# Altium PCB pcb.PcbDoc
Units mm, origin at the board's own origin, x right, y up, seen from the top; angles counter-clockwise.
Board outline 70.61 x 60.2 mm, 2 copper layers (Top Layer, Bottom Layer); 41 components, 34 nets, 156 pads, 19 vias.
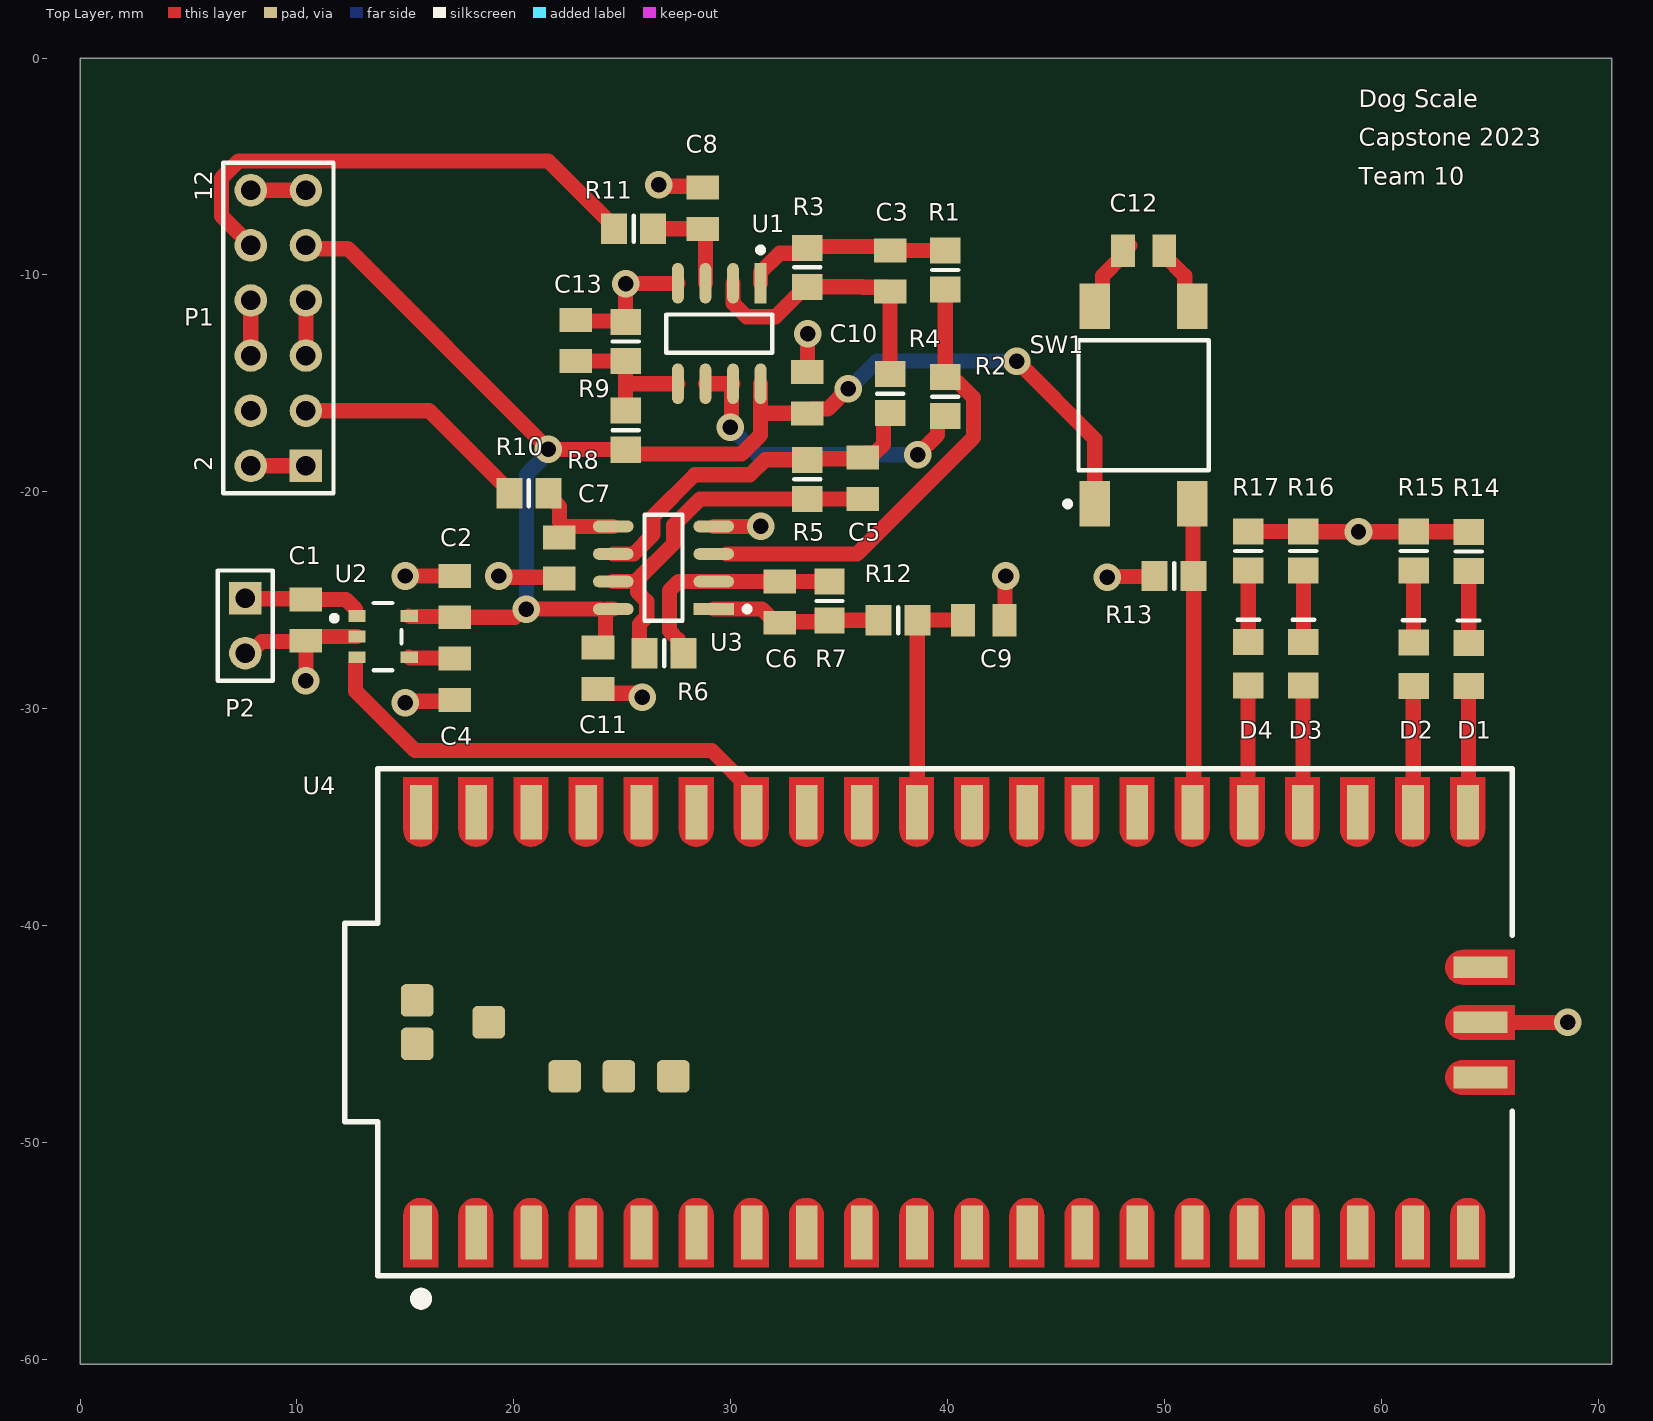
[diagram p0: Top Layer view]
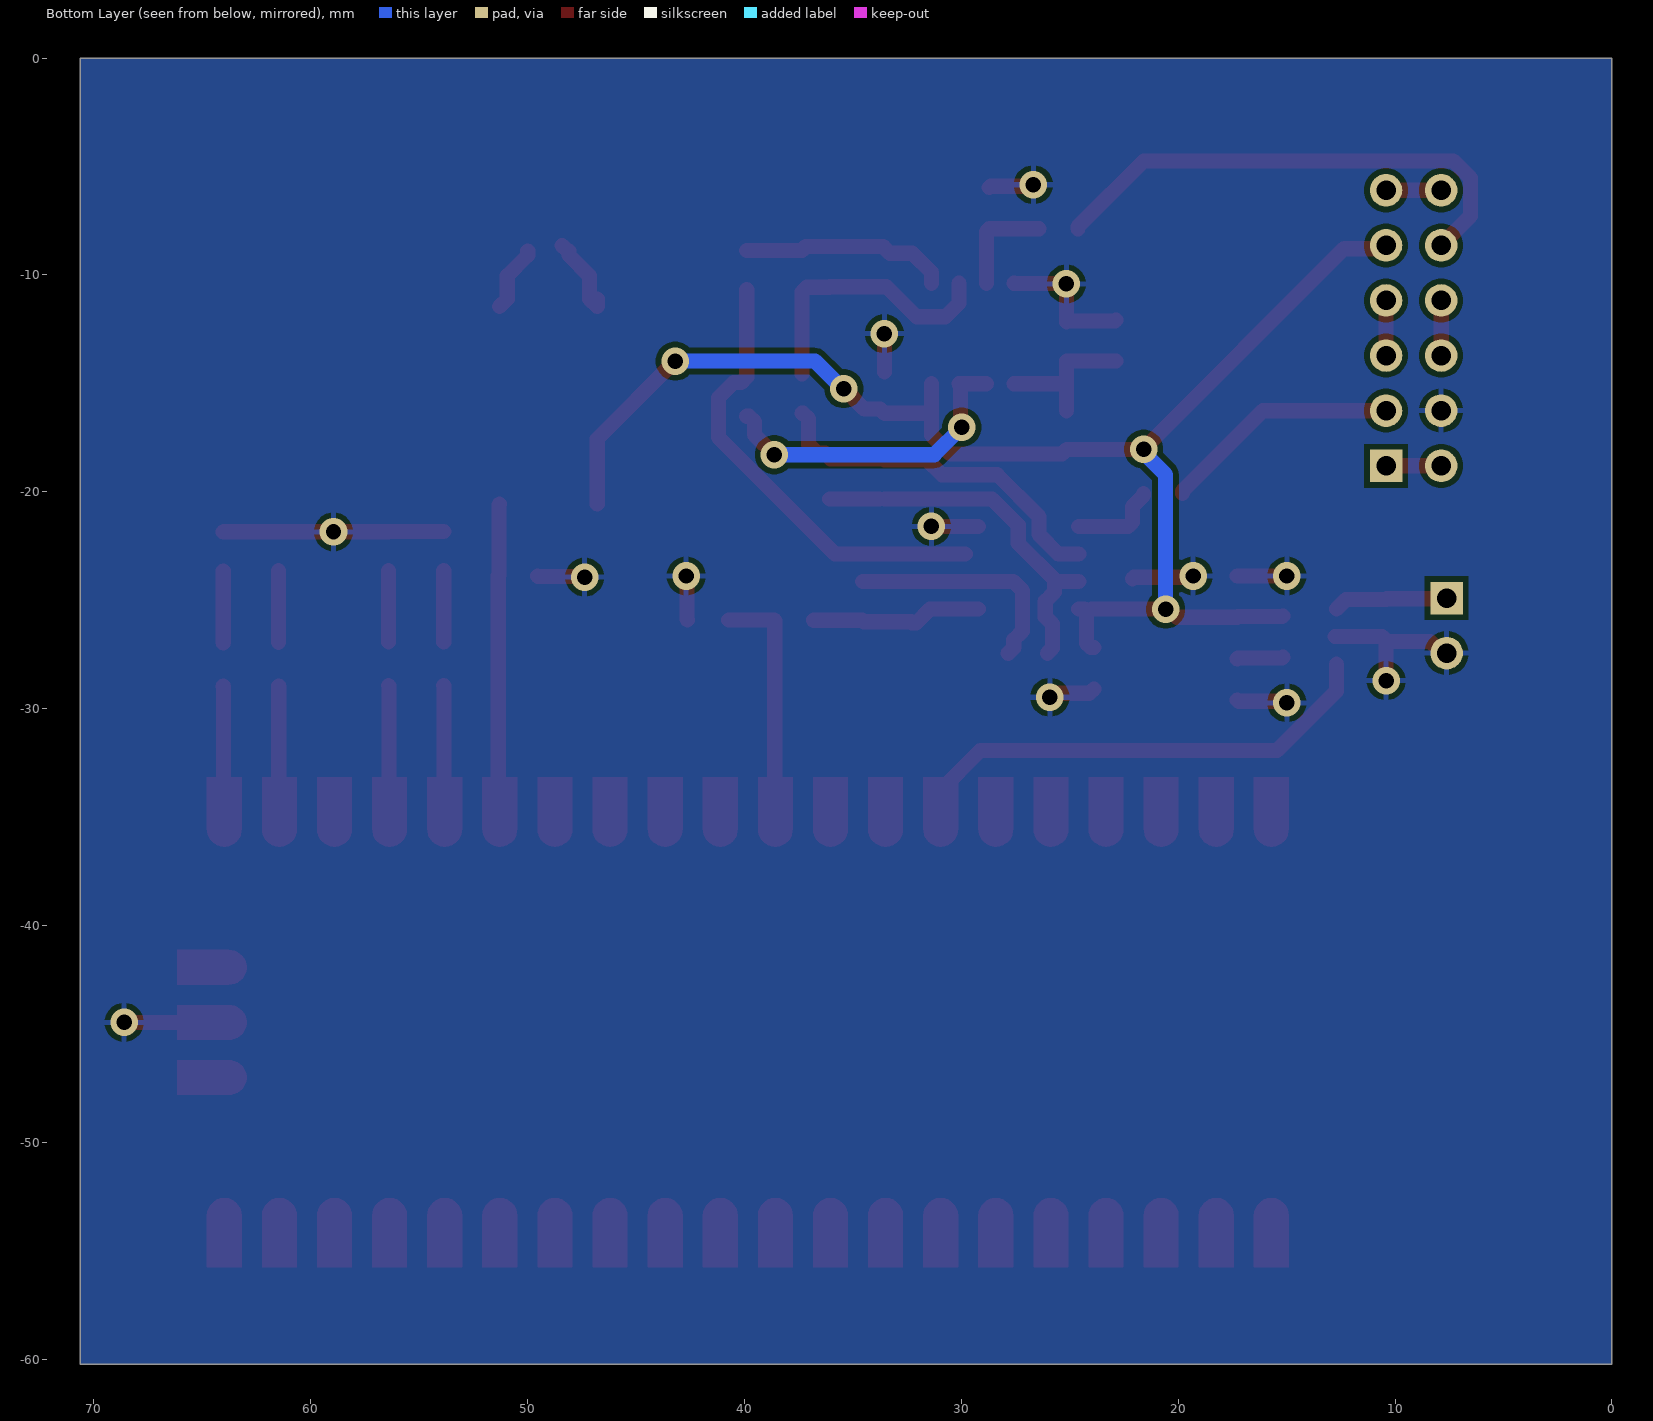
[diagram p1: Bottom Layer view, seen from below]

## Layer stack, top to bottom
Top Solder: solder mask 0.0102, Solder Resist, Dk 3.5
Top Layer: signal copper 0.0356
Dielectric 1: dielectric 0.32, FR-4, Dk 4.8
Bottom Layer: signal copper 0.0356
Bottom Solder: solder mask 0.0102, Solder Resist, Dk 3.5

## Board outline
0,-60.198 70.612,-60.198 70.612,0 0,0

## Design rules (kind name [scope] priority, off if disabled: settings)
Clearance [All] p1: gap=0.254 ignorepadtopadclearanceinfootprint=FALSE except(0: Arc-Hole Track-Hole SMDPad-Hole THPad-Hole Via-Hole Fill-Hole Poly-Hole Region-Hole Text-Hole)
PolygonConnect [All] p1: connectstyle=Relief reliefconductorwidth=0.254 reliefentries=4 polygonreliefangle="90 Angle" airgapwidth=0.254
RoomDefinition hardware [InComponentClass('hardware')] p1 off: confinementstyle=ConfineIn formatcopy=TRUE lockcomponents=FALSE outline -25.4,-127 25.4,-127 25.4,-101.6 -25.4,-101.6
RoutingVias [All] p1: holewidth=0.711 width=1.27 viastyle="Through Hole" minholewidth=0.711 minwidth=1.27 maxholewidth=0.711 maxwidth=1.27
SilkToSilkClearance [All] p1 off: silktosilkclearance=0.254
SilkToSolderMaskClearance [IsPad] p1 off: minsilkscreentomaskgap=0.254 clearancetoexposedcopper=TRUE
SolderMaskExpansion [All] p1: expansion=0.102 istentingtop=FALSE
Width [All] p1: maxlimit=0.7 minlimit=0.7 preferedwidth=0.7 minimp=50.000000 maximp=50.000000 favimp=50.000000
28 further rules are at their usual default settings.

## Components (designator, comment, footprint, x,y, rotation, side; value= is the part's Value field where it differs from the comment)
C1 "1u" C0805 10.414,-25.908 r90 top
C2 "2.2u" C0805 17.272,-24.826 r270 top
C3 "1n" C0805 37.338,-9.818 r90 top
C4 "100p" C0805 17.272,-28.636 r90 top
C5 "1n" C0805 36.068,-19.37 r90 top
C6 "22n" C0805 32.258,-25.08 r90 top
C7 "470n" C0805 22.098,-23.048 r90 top
C8 "470n" C0805 28.702,-6.924 r270 top
C9 "470k" C0805 41.656,-25.908 r180 top
C10 "100n" C0805 33.528,-15.428 r270 top
C11 "100n" C0805 23.876,-28.128 r90 top
C12 "470n" C0805 49.022,-8.89 r180 top
C13 "100n" C0805 22.86,-13.02 r270 top
D1 "LED" LED0805 64.008,-27.956 r90 top
D2 "LED" LED0805 61.468,-27.94 r90 top
D3 "LED" LED0805 56.388,-27.924 r90 top
D4 "LED" LED0805 53.848,-27.924 r90 top
P1 "Header 6X2" HDR2X6 10.414,-18.796 r90 top
P2 "Header 2" HDR1X2 7.62,-24.892 r270 top
R1 "10k" R0805 39.878,-9.768 r90 top
R2 "27k" R0805 39.878,-15.61 r90 top
R3 "270k" R0805 33.528,-9.652 r90 top
R4 "*" R0805 37.338,-15.472 r90 top
R5 "270k" R0805 33.528,-19.42 r90 top
R6 "10k" R0805 26.924,-27.432 r180 top
R7 "27k" R0805 34.544,-25.03 r90 top
R8 "15k" R0805 25.146,-17.156 r270 top
R9 "18k" R0805 25.146,-13.07 r270 top
R10 "1k" R0805 20.69,-20.066 r180 top
R11 "1k" R0805 25.516,-7.874 r180 top
R12 "1k" R0805 37.708,-25.908 r180 top
R13 "220" R0805 50.43,-23.876 r0 top
R14 "220" R0805 64.008,-22.744 r270 top
R15 "220" R0805 61.468,-22.722 r270 top
R16 "220" R0805 56.388,-22.722 r270 top
R17 "220" R0805 53.848,-22.722 r270 top
SW1 "FSM6JSMA" TECO-FSM6JSMA_V 49.022,-16.002 r180 top
U1 "LM358DR2G" FP-751-07-IPC_C 29.464,-12.7 r270 top
U2 "AP2202K-3.3TRG1" FP-SOT25-MFG 13.97,-26.67 r0 top
U3 "LM358DR2G" FP-751-07-IPC_C 26.894,-23.495 r180 top
U4 "RPI" RPI-PICO-MOD 40.132,-44.45 r90 top

## Footprints (in the part's own frame and the unit in brackets; to place one, negate y for a bottom-side part, rotate by r counter-clockwise, add the part's x,y. Pads: shape width x height; smd on the part's side, far side on the other; paste and mask are expansions set on the pad)
C0805 [mm]
  rect 1.1x1.5 smd: 1(-0.95,0) 2(0.95,0)
  body extent -1.1,-0.72 1.1,0.72, height 1.1
FP-751-07-IPC_C [mm]
  rect 1.874x0.543 smd paste+0 mask+0: 1(-2.316,1.905)
  rrect100% 1.874x0.543 smd paste+0 mask+0: 2(-2.316,0.635) 3(-2.316,-0.635) 4(-2.316,-1.905) 5(2.316,-1.905) 6(2.316,-0.635) 7(2.316,0.635) 8(2.316,1.905)
  silkscreen extent -3.98,-2.45 0.88,2.45, body extent -3.35,-2.55 3.35,2.55, height 0.25
FP-SOT25-MFG [mm]
  rect 0.8x0.55 smd paste+0 mask+0: 1(-1.2,0.95) 2(-1.2,0) 3(-1.2,-0.95) 4(1.2,-0.95) 5(1.2,0.95)
  silkscreen extent -2.37,-1.55 0.85,1.55, body extent -1.7,-1.65 1.7,1.65, height 0.25
HDR1X2 [mm] "Connector; Header; 2 Position"
  rect 1.5x1.5 hole 0.9: 1(0,0)
  round 1.5 hole 0.9: 2(2.54,0)
  silkscreen extent -1.27,-1.27 3.81,1.27
HDR2X6 [mm] "Connector; Header; 6x2 Position"
  rect 1.5x1.5 hole 0.9: 1(0,0)
  round 1.5 hole 0.9: 2(0,2.54) 3(2.54,0) 4(2.54,2.54) 5(5.08,0) 6(5.08,2.54) 7(7.62,0) 8(7.62,2.54) 9(10.16,0) 10(10.16,2.54) 11(12.7,0) 12(12.7,2.54)
  silkscreen extent -1.27,-1.27 13.97,3.81
LED0805 [mm]
  rect 1.2x1.4 smd: 1(-1,0) 2(1,0)
  silkscreen extent 2.03,-0.5 2.03,0.5, body extent -1.07,-0.7 1.07,0.7, height 0.65
R0805 [mm]
  rect 1.2x1.4 smd: 1(-0.9,0) 2(0.9,0)
  silkscreen extent 0,-0.6 0,0.6, body extent -1.07,-0.7 1.07,0.7, height 0.65
RPI-PICO-MOD [mm] "RASPBERRY PI PICO RP2040 BOARD"
  rect 2.5x1 smd mask+0.102: 1(-9.69,24.415) 2(-9.69,21.875) 4(-9.69,16.795) 5(-9.69,14.255) 6(-9.69,11.715) 7(-9.69,9.175) 8(-9.69,6.635) 9(-9.69,4.095) 10(-9.69,1.555) 11(-9.69,-0.985) 12(-9.69,-3.525) 13(-9.69,-6.065) 14(-9.69,-8.605) 15(-9.69,-11.145) 16(-9.69,-13.685) 17(-9.69,-16.225) 18(-9.69,-18.765) 19(-9.69,-21.305) 20(-9.69,-23.845)
  rrect25% 2.5x1 smd mask+0.102: 3(-9.69,19.335)
  rect 2.5x1 smd: 21(9.69,-23.845) 22(9.69,-21.305) 23(9.69,-18.765) 24(9.69,-16.225) 25(9.69,-13.685) 26(9.69,-11.145) 27(9.69,-8.605) 28(9.69,-6.065) 29(9.69,-3.525) 30(9.69,-0.985) 31(9.69,1.555) 32(9.69,4.095) 33(9.69,6.635) 34(9.69,9.175) 35(9.69,11.715) 36(9.69,14.255) 37(9.69,16.795) 38(9.69,19.335) 39(9.69,21.875) 40(9.69,24.415)
  rect 1x2.5 smd: 41(-2.54,-24.415) 42(0,-24.415) 43(2.54,-24.415)
  rrect30% 1.5x1.5 smd: 44(0.01,21.292) 45(1.01,24.592) 46(-0.99,24.592) 47(-2.49,17.792) 48(-2.49,15.292) 49(-2.49,12.792)
  Top Layer region: 11.292,-24.629 11.292,-23.029 8.892,-23.029 8.892,-23.029 8.545,-23.108 8.267,-23.33 8.112,-23.651 8.112,-24.007 8.267,-24.328 8.545,-24.55 8.892,-24.629 8.892,-24.629
  Top Layer region: 11.292,-22.089 11.292,-20.489 8.892,-20.489 8.892,-20.489 8.545,-20.568 8.267,-20.79 8.112,-21.111 8.112,-21.467 8.267,-21.788 8.545,-22.01 8.892,-22.089 8.892,-22.089
  Top Layer region: 11.292,-19.549 11.292,-17.949 8.892,-17.949 8.892,-17.949 8.545,-18.028 8.267,-18.25 8.112,-18.571 8.112,-18.927 8.267,-19.248 8.545,-19.47 8.892,-19.549 8.892,-19.549
  Top Layer region: 11.292,-17.009 11.292,-15.409 8.892,-15.409 8.892,-15.409 8.545,-15.488 8.267,-15.71 8.112,-16.031 8.112,-16.387 8.267,-16.708 8.545,-16.93 8.892,-17.009 8.892,-17.009
  Top Layer region: 11.292,-14.469 11.292,-12.869 8.892,-12.869 8.892,-12.869 8.545,-12.948 8.267,-13.17 8.112,-13.491 8.112,-13.847 8.267,-14.168 8.545,-14.39 8.892,-14.469 8.892,-14.469
  Top Layer region: 11.292,-11.929 11.292,-10.329 8.892,-10.329 8.892,-10.329 8.545,-10.408 8.267,-10.63 8.112,-10.951 8.112,-11.307 8.267,-11.628 8.545,-11.85 8.892,-11.929 8.892,-11.929
  Top Layer region: 11.292,-9.389 11.292,-7.789 8.892,-7.789 8.892,-7.789 8.545,-7.868 8.267,-8.09 8.112,-8.411 8.112,-8.767 8.267,-9.088 8.545,-9.31 8.892,-9.389 8.892,-9.389
  Top Layer region: 11.292,-6.849 11.292,-5.249 8.892,-5.249 8.892,-5.249 8.545,-5.328 8.267,-5.55 8.112,-5.871 8.112,-6.227 8.267,-6.548 8.545,-6.77 8.892,-6.849 8.892,-6.849
  Top Layer region: 11.292,-4.309 11.292,-2.709 8.892,-2.709 8.892,-2.709 8.545,-2.788 8.267,-3.01 8.112,-3.331 8.112,-3.687 8.267,-4.008 8.545,-4.23 8.892,-4.309 8.892,-4.309
  Top Layer region: 11.292,-1.769 11.292,-0.169 8.892,-0.169 8.892,-0.169 8.545,-0.248 8.267,-0.47 8.112,-0.791 8.112,-1.147 8.267,-1.468 8.545,-1.69 8.892,-1.769 8.892,-1.769
  Top Layer region: 11.292,0.771 11.292,2.371 8.892,2.371 8.892,2.371 8.545,2.292 8.267,2.07 8.112,1.749 8.112,1.393 8.267,1.072 8.545,0.85 8.892,0.771 8.892,0.771
  Top Layer region: 11.292,3.311 11.292,4.911 8.892,4.911 8.892,4.911 8.545,4.832 8.267,4.61 8.112,4.289 8.112,3.933 8.267,3.612 8.545,3.39 8.892,3.311 8.892,3.311
  Top Layer region: 11.292,5.851 11.292,7.451 8.892,7.451 8.892,7.451 8.545,7.372 8.267,7.15 8.112,6.829 8.112,6.473 8.267,6.152 8.545,5.93 8.892,5.851 8.892,5.851
  Top Layer region: 11.292,8.391 11.292,9.991 8.892,9.991 8.892,9.991 8.545,9.912 8.267,9.69 8.112,9.369 8.112,9.013 8.267,8.692 8.545,8.47 8.892,8.391 8.892,8.391
  Top Layer region: 11.292,10.931 11.292,12.531 8.892,12.531 8.892,12.531 8.545,12.452 8.267,12.23 8.112,11.909 8.112,11.553 8.267,11.232 8.545,11.01 8.892,10.931 8.892,10.931
  Top Layer region: 11.292,13.471 11.292,15.071 8.892,15.071 8.892,15.071 8.545,14.992 8.267,14.77 8.112,14.449 8.112,14.093 8.267,13.772 8.545,13.55 8.892,13.471 8.892,13.471
  Top Layer region: 11.292,16.011 11.292,17.611 8.892,17.611 8.892,17.611 8.545,17.532 8.267,17.31 8.112,16.989 8.112,16.633 8.267,16.312 8.545,16.09 8.892,16.011 8.892,16.011
  Top Layer region: 11.292,18.551 11.292,20.151 8.892,20.151 8.892,20.151 8.545,20.072 8.267,19.85 8.112,19.529 8.112,19.173 8.267,18.852 8.545,18.63 8.892,18.551 8.892,18.551
  Top Layer region: 11.292,21.091 11.292,22.691 8.892,22.691 8.892,22.691 8.545,22.612 8.267,22.39 8.112,22.069 8.112,21.713 8.267,21.392 8.545,21.17 8.892,21.091 8.892,21.091
  Top Layer region: 11.292,23.631 11.292,25.231 8.892,25.231 8.892,25.231 8.545,25.152 8.267,24.93 8.112,24.609 8.112,24.253 8.267,23.932 8.545,23.71 8.892,23.631 8.892,23.631
  Top Layer region: -11.292,23.631 -11.292,25.231 -8.892,25.231 -8.892,25.231 -8.545,25.152 -8.267,24.93 -8.112,24.609 -8.112,24.253 -8.267,23.932 -8.545,23.71 -8.892,23.631 -8.892,23.631
  Top Layer region: -11.292,21.091 -11.292,22.691 -8.892,22.691 -8.892,22.691 -8.545,22.612 -8.267,22.39 -8.112,22.069 -8.112,21.713 -8.267,21.392 -8.545,21.17 -8.892,21.091 -8.892,21.091
  Top Layer region: -11.292,18.551 -11.292,20.151 -8.892,20.151 -8.892,20.151 -8.545,20.072 -8.267,19.85 -8.112,19.529 -8.112,19.173 -8.267,18.852 -8.545,18.63 -8.892,18.551 -8.892,18.551
  Top Layer region: -11.292,16.011 -11.292,17.611 -8.892,17.611 -8.892,17.611 -8.545,17.532 -8.267,17.31 -8.112,16.989 -8.112,16.633 -8.267,16.312 -8.545,16.09 -8.892,16.011 -8.892,16.011
  Top Layer region: -11.292,13.471 -11.292,15.071 -8.892,15.071 -8.892,15.071 -8.545,14.992 -8.267,14.77 -8.112,14.449 -8.112,14.093 -8.267,13.772 -8.545,13.55 -8.892,13.471 -8.892,13.471
  Top Layer region: -11.292,10.931 -11.292,12.531 -8.892,12.531 -8.892,12.531 -8.545,12.452 -8.267,12.23 -8.112,11.909 -8.112,11.553 -8.267,11.232 -8.545,11.01 -8.892,10.931 -8.892,10.931
  Top Layer region: -11.292,8.391 -11.292,9.991 -8.892,9.991 -8.892,9.991 -8.545,9.912 -8.267,9.69 -8.112,9.369 -8.112,9.013 -8.267,8.692 -8.545,8.47 -8.892,8.391 -8.892,8.391
  Top Layer region: -11.292,5.851 -11.292,7.451 -8.892,7.451 -8.892,7.451 -8.545,7.372 -8.267,7.15 -8.112,6.829 -8.112,6.473 -8.267,6.152 -8.545,5.93 -8.892,5.851 -8.892,5.851
  Top Layer region: -11.292,3.311 -11.292,4.911 -8.892,4.911 -8.892,4.911 -8.545,4.832 -8.267,4.61 -8.112,4.289 -8.112,3.933 -8.267,3.612 -8.545,3.39 -8.892,3.311 -8.892,3.311
  Top Layer region: -11.292,0.771 -11.292,2.371 -8.892,2.371 -8.892,2.371 -8.545,2.292 -8.267,2.07 -8.112,1.749 -8.112,1.393 -8.267,1.072 -8.545,0.85 -8.892,0.771 -8.892,0.771
  Top Layer region: -11.292,-1.769 -11.292,-0.169 -8.892,-0.169 -8.892,-0.169 -8.545,-0.248 -8.267,-0.47 -8.112,-0.791 -8.112,-1.147 -8.267,-1.468 -8.545,-1.69 -8.892,-1.769 -8.892,-1.769
  Top Layer region: -11.292,-4.309 -11.292,-2.709 -8.892,-2.709 -8.892,-2.709 -8.545,-2.788 -8.267,-3.01 -8.112,-3.331 -8.112,-3.687 -8.267,-4.008 -8.545,-4.23 -8.892,-4.309 -8.892,-4.309
  Top Layer region: -11.292,-6.849 -11.292,-5.249 -8.892,-5.249 -8.892,-5.249 -8.545,-5.328 -8.267,-5.55 -8.112,-5.871 -8.112,-6.227 -8.267,-6.548 -8.545,-6.77 -8.892,-6.849 -8.892,-6.849
  Top Layer region: -11.292,-9.389 -11.292,-7.789 -8.892,-7.789 -8.892,-7.789 -8.545,-7.868 -8.267,-8.09 -8.112,-8.411 -8.112,-8.767 -8.267,-9.088 -8.545,-9.31 -8.892,-9.389 -8.892,-9.389
  Top Layer region: -11.292,-11.929 -11.292,-10.329 -8.892,-10.329 -8.892,-10.329 -8.545,-10.408 -8.267,-10.63 -8.112,-10.951 -8.112,-11.307 -8.267,-11.628 -8.545,-11.85 -8.892,-11.929 -8.892,-11.929
  Top Layer region: -11.292,-14.469 -11.292,-12.869 -8.892,-12.869 -8.892,-12.869 -8.545,-12.948 -8.267,-13.17 -8.112,-13.491 -8.112,-13.847 -8.267,-14.168 -8.545,-14.39 -8.892,-14.469 -8.892,-14.469
  Top Layer region: -11.292,-17.009 -11.292,-15.409 -8.892,-15.409 -8.892,-15.409 -8.545,-15.488 -8.267,-15.71 -8.112,-16.031 -8.112,-16.387 -8.267,-16.708 -8.545,-16.93 -8.892,-17.009 -8.892,-17.009
  Top Layer region: -11.292,-19.549 -11.292,-17.949 -8.892,-17.949 -8.892,-17.949 -8.545,-18.028 -8.267,-18.25 -8.112,-18.571 -8.112,-18.927 -8.267,-19.248 -8.545,-19.47 -8.892,-19.549 -8.892,-19.549
  Top Layer region: -11.292,-22.089 -11.292,-20.489 -8.892,-20.489 -8.892,-20.489 -8.545,-20.568 -8.267,-20.79 -8.112,-21.111 -8.112,-21.467 -8.267,-21.788 -8.545,-22.01 -8.892,-22.089 -8.892,-22.089
  Top Layer region: -11.292,-24.629 -11.292,-23.029 -8.892,-23.029 -8.892,-23.029 -8.545,-23.108 -8.267,-23.33 -8.112,-23.651 -8.112,-24.007 -8.267,-24.328 -8.545,-24.55 -8.892,-24.629 -8.892,-24.629
  Top Layer region: 3.34,-25.999 1.74,-25.999 1.74,-23.599 1.74,-23.599 1.819,-23.252 2.041,-22.974 2.362,-22.819 2.718,-22.819 3.039,-22.974 3.261,-23.252 3.34,-23.599 3.34,-23.599
  Top Layer region: 0.8,-25.999 -0.8,-25.999 -0.8,-23.599 -0.8,-23.599 -0.721,-23.252 -0.499,-22.974 -0.178,-22.819 0.178,-22.819 0.499,-22.974 0.721,-23.252 0.8,-23.599 0.8,-23.599
  Top Layer region: -1.74,-25.999 -3.34,-25.999 -3.34,-23.599 -3.34,-23.599 -3.261,-23.252 -3.039,-22.974 -2.718,-22.819 -2.362,-22.819 -2.041,-22.974 -1.819,-23.252 -1.74,-23.599 -1.74,-23.599
  silkscreen extent -12.99,-25.88 11.68,27.94, body extent -10.49,-25.21 10.51,27.22, height 3.69
TECO-FSM6JSMA_V [mm] "SMD, 4-Leads, Body 6x6mm, Pitch 4.5mm"
  rect 1.4x2.1 smd: 1(2.25,4.55) 2(2.25,-4.55) 3(-2.25,4.55) 4(-2.25,-4.55)
  silkscreen extent -3,-3 3.62,4.67, body extent -3,-5 3,5, height 7.11

## Part data
C1 C2 C3 C4 C5 C6 C7 C8 C9 C10 C11 C12 C13: library part CCAP0805, "CCAP0805"
P1: "Header, 6-Pin, Dual row", LatestRevisionDate=17-Jul-2002, LatestRevisionNote="Re-released for DXP Platform.", Publisher="Altium Limited"
P2: "Header, 2-Pin", LatestRevisionDate=17-Jul-2002, LatestRevisionNote="Re-released for DXP Platform.", Publisher="Altium Limited"
R1 R2 R3 R4 R5 R6 R7 R8 R9 R10 R11 R12 R13 R14 R15 R16 R17: library part RES0805, "RES0805"
SW1: library part CMP-2000-07503-1, "Switch, SPST, 24 V, -35 to 85 degC, 4-Pin SMD, RoHS, Tape and Reel", Case\/Package=SMD/SMT, Contact Current Rating=50mA, Contact Resistance=100mOhm, Insulation Resistance=100MOhm, Manufacturer="TE Connectivity", Max Operating Temperature=85degC, Max Voltage Rating (DC)=12V, Min Operating Temperature=-35degC, Operating Force=1.57N, Package Description="4-Pin Surface Mount Device, Body 6 x 6 mm, Pitch 4.5 mm", Package Quantity=750, Supplier Part Number 1=450-1133-ND, Voltage Rating=24V, Actuator Length=3.4mm, Actuator Material=Polyamide, Actuator Type=Standard, Category=Uncategorized, Contact Material=CopperAlloy, Contact Plating=Silver, Current Rating=50mA, Datasheet URL=http://www.te.com/commerce/DocumentDelivery/DDEController?Action=showdoc&DocId=Customer+Drawing%7F2-1437565-7%7FV%7Fpdf%7FEnglish%7FENG_CD_2-1437565-7_V.pdf%7F4-1437565-9, Datasheet Version="Rev. V, 02/2015", Depth=10mm, Electrical Life=100000Cycles, ELV=Compliant, Illumination Type=Illuminated, Lead Free=LeadFree, Length=6mm, Manufacturer Part Number=FSM6JSMA, Manufacturer URL=http://www.te.com/, Max Current Rating=50mA, Mechanical Life=100000Cycles, Mount=SurfaceMount, Mounting Technology=SurfaceMount, Orientation=Straight, Package Reference=FSM6JSMA, Packaging=LoosePiece, Pricing 1="1=0.35000, 10=0.33500, 25=0.31560, 100=0.27390, 250=0.24852, 500=0.23116, 1000=0.20805, 2500=0.19534, 5000=0.18147 (USD)", Radiation Hardening=No, REACH SVHC=Unknown, RoHS=Yes, RoHS Compliant=Yes, RoHSCompliant=true, Series=FSMJSMA, Stock 1=22985, Supplier 1=Digi-Key, Switch Function=Off-Mom, Switch Travel=0.25mm, Termination=GullWing, Throw Configuration=SPST, Type=Switch, Voltage Rating (DC)=24V, Width=6mm
U1 U3: library part CMP-1310-00291-2, "IC OPAMP GP 2 CIRCUIT 8SOIC", Case/Package=SOIC, Dual Supply Voltage=9V, Input Bias Current=250nA, Input Offset Voltage (Vos)=7mV, Manufacturer="ON Semiconductor", Max Dual Supply Voltage=16V, Max Operating Temperature=70°C, Max Supply Voltage=32V, Min Dual Supply Voltage=1.5V, Min Operating Temperature=0°C, Min Supply Voltage=3V, Nominal Supply Current=1.2mA, Operating Supply Current=1.5mA, Output Current=40mA, Package Quantity=2500, Power Supply Rejection Ratio (PSRR)=65dB, Supplier Part Number 1=LM358DR2GOSCT-ND, Voltage Gain=100dB, Amplifier Type="GENERAL PURPOSE", Bandwidth=1MHz, Category="Amplifiers - Op Amps, Buffer, Instrumentation", Channel Separation=-120dB, Common Mode Rejection Ratio=65dB, Contact Plating=Tin, Gain Bandwidth Product=1MHz, Halogen Free="Halogen Free", Height=1.5mm, Lead Free="Lead Free", Length=5mm, Manufacturer Part Number=LM358DR2G, Number of Amplifiers=2, Number of Channels=2, Number of Circuits=2, Number of Elements=2, Number of Pins=8, Operating Supply Voltage=16V, Output Current per Channel=40mA, Packaging="Tape and Reel", Pricing 1="1=0.48000, 10=0.38600, 25=0.35320, 100=0.26290, 250=0.23824, 500=0.19716, 1000=0.14787 (USD)", Radiation Hardening=No, REACH SVHC="No SVHC", Reach SVHC Compliant=Yes, RoHS=Yes, RoHS Compliant=Yes, Series=-, Slew Rate=0.6V/µs, Stock 1=86894, Supplier 1=Digi-Key, Supply Current=1.2mA, Technology=BIPOLAR, Width=4mm
U2: library part CMP-12756-000010-1, "IC REG LINEAR 3.3V 150MA SOT23-5", Case/Package=SOT-23-5, Dropout Voltage=165mV, Manufacturer="Diodes Inc.", Max Input Voltage=13.2V, Max Junction Temp=+125°C, Max Operating Temperature=125°C, Max Output Current=150mA, Min Input Voltage=2.5V, Min Operating Temperature=-40°C, Nominal Supply Current=95-1300uA, Output Voltage=3.3V, Package=SOT25, Package Quantity=1, Power Supply Rejection Ratio (PSRR)=75dB, Quiescent Current=130uA, Supplier Part Number 1=AP2202K-3.3TRG1DICT-ND, Temperature="-40°C to +125°C", Accuracy=1%, Accuracy Percentage=1%, Automotive=No, Category=IC, ComponentLink1Description=https://datasheet.ciiva.com/30016/ap2202-30016782.pdf?src-supplier=Avnet, ComponentLink1URL=https://datasheet.ciiva.com/30016/ap2202-30016782.pdf?src-supplier=Avnet, ComponentLink2Description=Datasheet, ComponentLink2URL=https://www.diodes.com/assets/Datasheets/AP2202.pdf, ComponentLink3Description=https://datasheet.ciiva.com/29568/ap2202-29568315.pdf?src-supplier=Digi-Key, ComponentLink3URL=https://datasheet.ciiva.com/29568/ap2202-29568315.pdf?src-supplier=Digi-Key, ComponentLink4Description=https://datasheet.ciiva.com/29568/ap2202-29568316.pdf?src-supplier=Digi-Key, ComponentLink4URL=https://datasheet.ciiva.com/29568/ap2202-29568316.pdf?src-supplier=Digi-Key, ComponentLink5Description=https://datasheet.ciiva.com/29568/ap2202-29568314.pdf?src-supplier=Digi-Key, ComponentLink5URL=https://datasheet.ciiva.com/29568/ap2202-29568314.pdf?src-supplier=Digi-Key, Device Class L1="Integrated Circuits (ICs)", Device Class L2="Power Management ICs", Device Class L3="Voltage Regulators - Linear", Digikey Description="IC REG LINEAR 3.3V 150MA SOT23-5", Footprint Url=https://www.diodes.com/assets/Package-Files/SOT25.pdf, Height=1.4mm, Ipc Land Pattern Name=SOT95P280X115-5, Lead Free=Yes, Length=3.02mm, Manufacturer Part Number=AP2202K-3.3TRG1, Max Supply Voltage=13.2V, Min Supply Voltage=2.5V, Mount="Surface Mount", Mouser Description="LDO Voltage Regulators 150mA CMOS LDO 3.3V", Number Of Outputs=1, Number of Pins=5, Number of Regulators=1, Octopart=https://octopart.com/ap2202k-3.3trg1-diodes+inc.-30954618, Output Current=150mA, Output Type=Fixed, Packaging="Tape and Reel", Polarity=Positive, Pricing 1="1=0.46000, 10=0.34300, 25=0.30880, 100=0.21350, 250=0.17976, 500=0.14606, 1000=0.11236 (USD)", RoHS=TRUE, RoHS Compliant=Yes, Standoff Height=0.013mm, Stock 1=55855, Supplier 1=Digi-Key, Temperature Range High=+125°C, Temperature Range Low=-40°C, Weight=0.001058oz, Width=1.7mm

## Via types
v1: diameter 1.27, hole 0.711, Top Layer to Bottom Layer, 19 vias

## Nets (pads, with @x,y where several pads share a name; then routed paths per layer and width w, separated by ;. In a path a pad name is that pad's centre, name@x,y a point inside that pad or via, vN(x,y) a via of type N, cw(c..) or ccw(c..) an arc to the next point about the centre after c; other vN are vias at no path point)
GND: C1.1 C2.1 C4.1 C7.1 C8.1 C9.1 C10.1 C11.1 C13.1 P1.4 P2.2 R9.1 R13.1 R14.1 R15.1 R16.1 R17.1 U1.4 U2.2 U3.4 U4.42 | length 48
  Top Layer w0.7: P2.2 7.836,-27.432 8.377,-26.891 10.381,-26.891 C1.1 ; v1(10.414,-28.702) C1.1 ; U2.2 10.602,-26.67 C1.1 ; v1(14.986,-29.718) 15.052,-29.652 17.206,-29.652 C4.1 ; v1(14.986,-23.876) C2.1 ; v1(19.304,-23.876) 19.365,-23.937 22.037,-23.937 C7.1 ; C13.1 22.91,-12.12 25.096,-12.12 R9.1 v1(25.146,-10.414) 25.161,-10.399 27.544,-10.399 U1.4 ; C11.1 24.076,-29.278 25.568,-29.278 25.754,-29.464 v1(25.908,-29.464) ; v1(26.67,-5.842) 26.736,-5.908 28.636,-5.908 C8.1 ; U3.4 31.365,-21.59 v1(31.369,-21.586) ; C10.1 33.531,-14.475 33.531,-12.709 v1(33.534,-12.706) ; C9.1 42.639,-25.875 42.639,-23.909 v1(42.672,-23.876) ; v1(47.355,-23.923) 47.379,-23.9 49.506,-23.9 R13.1 ; R17.1 R16.1 56.399,-21.833 58.917,-21.833 v1(58.928,-21.844) 58.939,-21.833 61.457,-21.833 R15.1 61.479,-21.833 63.997,-21.833 R14.1 ; U4.42 v1(68.58,-44.45)
NetC3_1: C3.1 R3.1 R4.2 U1.2 | length 12.9
  Top Layer w0.7: U1.2 30.099,-11.303 30.721,-11.925 32.055,-11.925 33.436,-10.544 36.06,-10.544 36.084,-10.568 37.122,-10.568 37.338,-10.784 R4.2
NetC3_2: C3.2 R1.2 R3.2 U1.1 | length 9.6
  Top Layer w0.7: U1.1 31.369,-9.875 32.242,-9.002 33.278,-9.002 R3.2 33.586,-8.694 37.164,-8.694 C3.2 R1.2
NetC4_2: C4.2 U2.4 | length 2.1
  Top Layer w0.7: U2.4 15.203,-27.653 17.239,-27.653 C4.2
NetC5_1: C5.1 R5.1 R6.2 U3.7 | length 16.8
  Top Layer w0.7: U3.7 U3.7@25.4,-24.13 ; R6.2 25.79,-27.198 25.79,-26.092 26.119,-25.763 26.119,-25.037 25.698,-24.616 25.698,-24.036 27.37,-22.364 27.37,-21.526 28.576,-20.32 R5.1 ; R5.1@33.782,-20.32 C5.1
NetC5_2: C5.2 R4.1 R5.2 U3.6 | length 16.6
  Top Layer w0.7: U3.6 25.525,-22.86 26.416,-21.969 26.416,-21.131 28.336,-19.211 30.88,-19.211 31.571,-18.52 R5.2 33.578,-18.47 36.018,-18.47 36.268,-18.22 36.624,-18.22 37.035,-17.81 37.035,-16.622 37.285,-16.372 R4.1
NetC6_2: C6.2 R6.1 R7.2 U3.2 | length 10.7
  Top Layer w0.7: R6.1 27.574,-27.182 27.574,-26.812 27.178,-26.416 27.178,-24.54 27.588,-24.13 C6.2 R7.2
NetC12_1: C12.1 SW1.4 | length 3.1
  Top Layer w0.7: C12.1 49.972,-9.09 50.922,-10.04 50.922,-11.102 SW1.4
NetC12_2: C12.2 SW1.2 | length 3.7
  Top Layer w0.7: SW1.2@46.772,-11.102 SW1.2 47.122,-11.102 47.122,-10.04 48.072,-9.09 C12.2 ; C12.2@48.192,-8.836 C12.2@48.392,-8.636
NetC13_2: C13.2 R8.1 R9.2 U1.5 | length 7
  Top Layer w0.7: C13.2 R9.2 25.146,-15.113 ; R8.1 25.146,-15.113 ; U1.5 25.243,-15.016 25.146,-15.113
NetD1_2: D1.2 R14.2 | length 3.3
  Top Layer w0.7: D1.2 R14.2
NetD2_2: D2.2 R15.2 | length 3.3
  Top Layer w0.7: D2.2 R15.2
NetD3_2: D3.2 R16.2 | length 3.3
  Top Layer w0.7: D3.2 R16.2
NetD4_2: D4.2 R17.2 | length 3.3
  Top Layer w0.7: D4.2 R17.2
NetP1_1: P1.1 P1.2 | length 2.5
  Top Layer w0.7: P1.2@7.612,-18.796 P1.1@10.152,-18.796
NetP1_5: P1.5 P1.7 | length 2.5
  Top Layer w0.7: P1.5 P1.7@10.414,-11.262
NetP1_6: P1.6 P1.8 | length 2.4
  Top Layer w0.7: P1.6 P1.8@7.874,-11.325
NetP1_11: P1.11 P1.12 | length 2.5
  Top Layer w0.7: P1.12 P1.11
NetR1_1: R1.1 R2.2 U3.3 | length 21.2
  Top Layer w0.7: U3.3@29.797,-22.86 35.814,-22.86 41.182,-17.492 41.182,-15.66 40.482,-14.96 40.128,-14.96 R2.2 R1.1
PwrLED: D1.1 U4.21 | length 5.8
  Top Layer w0.7: U4.21 63.993,-34.744 63.993,-28.971 D1.1
RegEn: U2.3 U4.34 | length 22.4
  Top Layer w0.7: 12.7,-27.94 12.7,-29.184 15.436,-31.921 29.118,-31.921 30.957,-33.76 U4.34
SteadyLED: D3.1 U4.24 | length 5.8
  Top Layer w0.7: U4.24 56.373,-34.744 56.373,-28.94 D3.1
TarLED: D4.1 U4.25 | length 5.8
  Top Layer w0.7: U4.25 53.833,-34.744 53.833,-28.94 D4.1
TarSw: R13.2 SW1.3 U4.26 | length 14.3
  Top Layer w0.7: SW1.3 51.301,-20.581 51.301,-23.847 R13.2 51.33,-34.707 U4.26
VBAT: C1.2 P2.1 U2.1 | length 5.3
  Top Layer w0.7: P2.1 7.653,-24.925 10.381,-24.925 C1.2 12.258,-24.958 12.7,-25.4
VCC: C2.2 C10.2 C11.2 P1.9 R8.2 SW1.1 U1.8 U2.5 U3.8 | length 67.7
  Top Layer w0.7: P1.9 10.567,-8.789 12.345,-8.789 v1(21.59,-18.034) 21.601,-18.045 25.135,-18.045 25.347,-18.257 30.485,-18.257 31.369,-17.373 31.369,-16.51 ; U2.5 15.198,-25.748 17.244,-25.748 C2.2 20.044,-25.776 20.42,-25.4 v1(20.574,-25.4) U3.8@23.991,-25.4 ; C11.2 24.027,-27.178 24.227,-26.978 24.227,-25.478 24.305,-25.4 U3.8 ; U1.8 31.369,-16.51 ; v1(35.406,-15.24) 34.468,-16.178 33.728,-16.178 C10.2 31.501,-16.378 31.369,-16.51 ; v1(43.18,-13.97) 46.772,-17.562 SW1.1
  Bottom Layer w0.7: v1(20.574,-25.4) 20.574,-19.204 21.59,-18.188 v1(21.59,-18.034) ; v1(35.406,-15.24) 35.467,-15.24 36.737,-13.97 v1(43.18,-13.97)
Vfil: C6.1 R7.1 R12.2 U3.1 | length 7.9
  Top Layer w0.7: U3.1 31.428,-25.4 32.058,-26.03 C6.1 32.308,-25.98 34.494,-25.98 R7.1 34.555,-25.919 36.797,-25.919 R12.2
Vin+: C7.2 R10.1 U3.5 | length 4.1
  Top Layer w0.7: R10.1 21.59,-20.166 22.098,-20.674 22.098,-21.386 22.302,-21.59 U3.5
Vin-: C8.2 R11.1 U1.3 | length 4.8
  Top Layer w0.7: R11.1 C8.2 28.829,-8.001 U1.3
Voff: R2.1 U1.6 U1.7 | length 14.8
  Top Layer w0.7: U1.6 U1.7 30.035,-15.08 30.035,-16.954 v1(29.972,-17.018) ; v1(38.608,-18.288) 39.528,-17.368 39.528,-16.76 39.778,-16.51 R2.1
  Bottom Layer w0.7: v1(29.972,-17.018) 31.242,-18.288 v1(38.608,-18.288)
Vout: C9.2 R12.1 U4.31 | length 11
  Top Layer w0.7: U4.31 38.593,-34.744 38.593,-25.923 R12.1 C9.2
Vsen+: P1.3 R10.2 | length 11
  Top Layer w0.7: P1.3 16.08,-16.256 19.79,-19.966 R10.2
Vsen-: P1.10 R11.2 | length 23.4
  Top Layer w0.7: P1.10 6.52,-7.282 6.52,-5.535 7.313,-4.742 21.584,-4.742 24.616,-7.774 R11.2
WifiLED: D2.1 U4.22 | length 5.8
  Top Layer w0.7: U4.22 61.453,-34.744 61.453,-28.955 D2.1
pads on no net: U4.1 U4.2 U4.3 U4.4 U4.5 U4.6 U4.7 U4.8 U4.9 U4.10 U4.11 U4.12 U4.13 U4.14 U4.15 U4.16 U4.17 U4.18 U4.19 U4.20 U4.23 U4.27 U4.28 U4.29 U4.30 U4.32 U4.33 U4.35 U4.36 U4.37 U4.38 U4.39 U4.40 U4.41 U4.43 U4.44 U4.45 U4.46 U4.47 U4.48 U4.49

## Polygon pours and split planes (outlines as drawn)
GND on Bottom Layer "GND_L02_P000" (solid, pour order 0): 0,0 70.612,0 70.612,-60.198 0,-60.198

## Silkscreen, mask and mechanical layers (free items; w line width, h text height)
Top Overlay:
  text "Dog Scale" at 58.928,-2.273 h0.8
  text "Capstone 2023" at 58.928,-4.051 h0.8
  text "Team 10" at 58.928,-5.842 h0.8

## Text inside footprints (layer, text, board x,y; h text height)
P1: Top Overlay "12" at 6.096,-6.604 h0.8 r90; Top Overlay "2" at 6.096,-19.05 h0.8 r90